# Altium PCB DE-140824_1.PcbDoc
Units mil, origin at the board's own origin, x right, y up, seen from the top; angles counter-clockwise.
Board outline 2559.06 x 1181.1 mil, 2 copper layers (Top Layer, Bottom Layer); 26 components, 215 nets, 80 pads, 8 vias.
Unrouted connection lines stored in the file: 1.
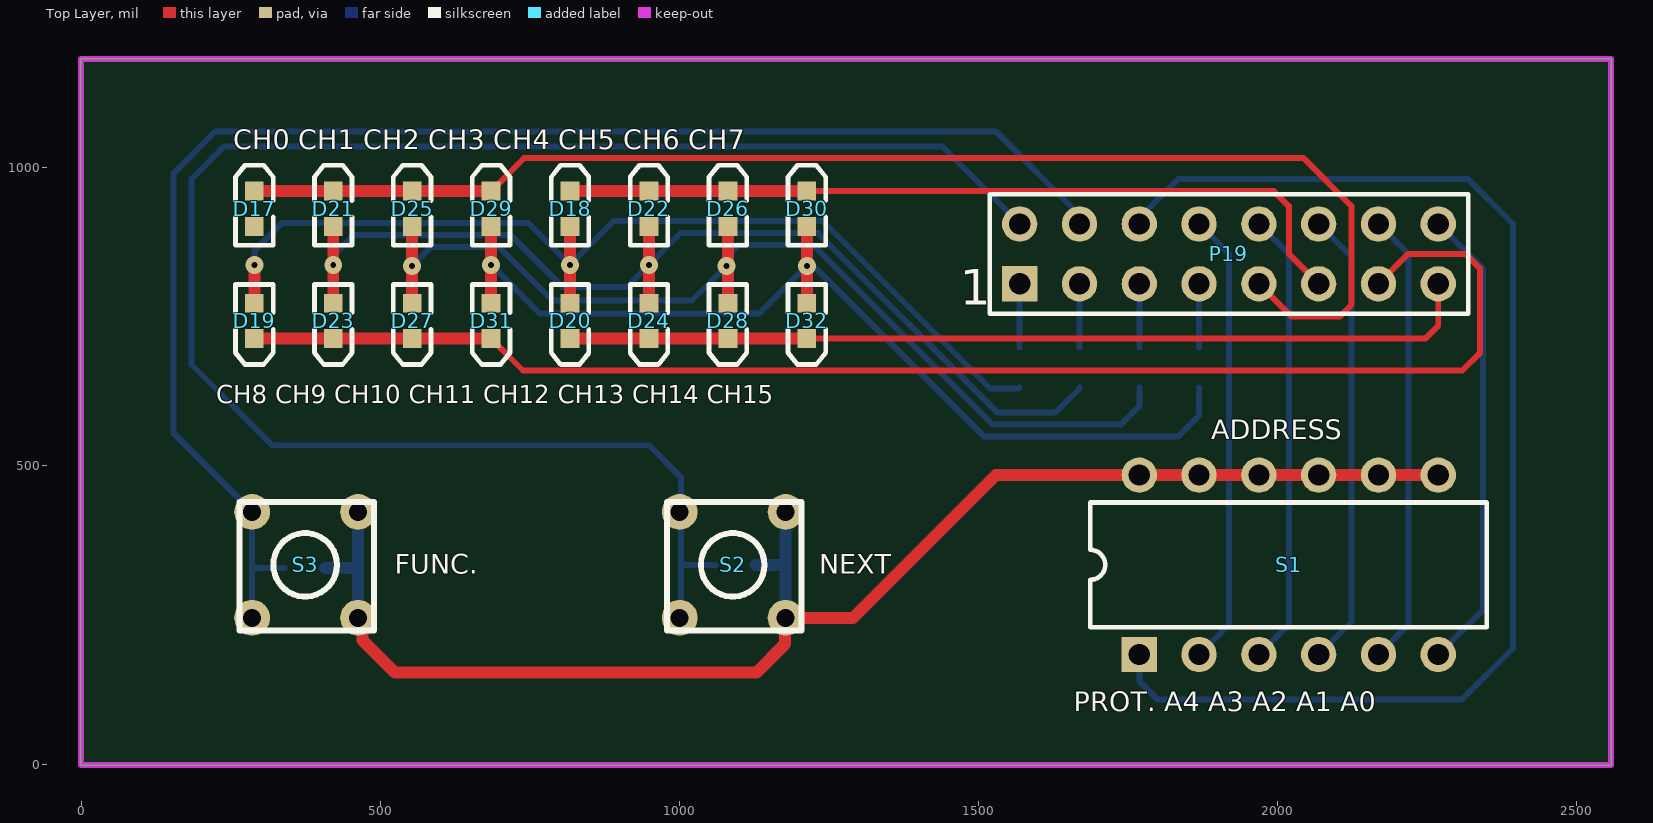
[diagram p0: Top Layer view]
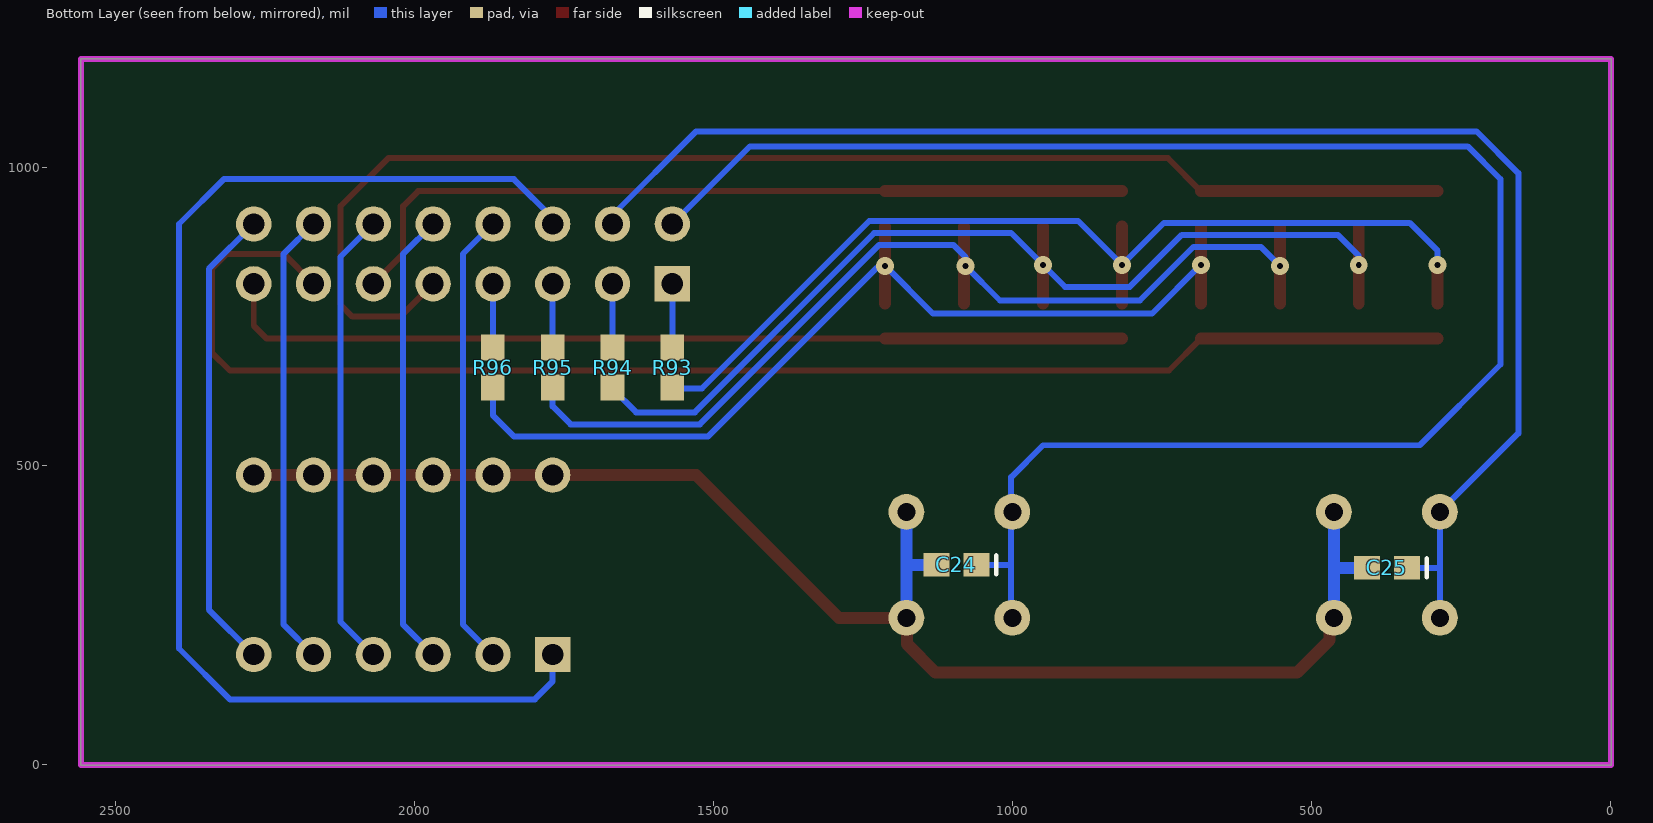
[diagram p1: Bottom Layer view, seen from below]

## Layer stack, top to bottom
Top Solder: solder mask 0.4, Solder Resist, Dk 3.5
Top Layer: signal copper 1.4
Dielectric 1: dielectric 12.6, FR-4, Dk 4.8
Bottom Layer: signal copper 1.4
Bottom Solder: solder mask 0.4, Solder Resist, Dk 3.5

## Board outline
-1.26,-0.3 -1.26,1180.81 2557.8,1180.81 2557.8,-0.3

## Design rules (kind name [scope] priority, off if disabled: settings)
Clearance [All] p1: gap=10 ignorepadtopadclearanceinfootprint=FALSE
PolygonConnect [All] p1: connectstyle=Relief reliefconductorwidth=10 reliefentries=4 polygonreliefangle="90 Angle" airgapwidth=10
RoutingVias [All] p1: holewidth=28 width=50 viastyle="Through Hole" minholewidth=10 minwidth=30 maxholewidth=28 maxwidth=50
SolderMaskExpansion [All] p1: expansion=4 istentingtop=FALSE
SupplyNets "Schematic Supply Nets_10" [InNet('L1')] p1: voltage=0.000
SupplyNets "Schematic Supply Nets_9" [InNet('GND1')] p2: voltage=0.000
SupplyNets "Schematic Supply Nets_8" [InNet('GND')] p3: voltage=0.000
SupplyNets "Schematic Supply Nets_7" [InNet('L_1')] p4: voltage=0.000
SupplyNets "Schematic Supply Nets_6" [InNet('L_2')] p5: voltage=0.000
SupplyNets "Schematic Supply Nets_5" [InNet('3V3')] p6: voltage=0.000
SupplyNets "Schematic Supply Nets_4" [InNet('F2')] p7: voltage=0.000
SupplyNets "Schematic Supply Nets_3" [InNet('F1')] p8: voltage=0.000
SupplyNets "Schematic Supply Nets_2" [InNet('5V')] p9: voltage=0.000
SupplyNets "Schematic Supply Nets_1" [InNet('L2')] p10: voltage=0.000
SupplyNets "Schematic Supply Nets" [InNet('12V')] p11: voltage=0.000
Width [All] p1: maxlimit=100 minlimit=10 preferedwidth=20
30 further rules are at their usual default settings.

## Classes and differential pairs
component class DE-140824: P2 P3 P10 P11 P12 P13 U1 U3 U4

## Components (designator, comment, footprint, x,y, rotation, side; value= is the part's Value field where it differs from the comment)
C24 "C0603" 0603 1093.74,334.7 r0 bottom value=100nF
C25 "C0603" 0603 373.74,329.7 r0 bottom value=100nF
D17 "LED0" 1.6X0.8X0.8 288.74,930.18 r90 top
D18 "LED4" 1.6X0.8X0.8 816.74,930.18 r90 top
D19 "LED8" 1.6X0.8X0.8 288.74,742.58 r270 top
D20 "LED12" 1.6X0.8X0.8 816.74,742.58 r270 top
D21 "LED1" 1.6X0.8X0.8 420.74,930.18 r90 top
D22 "LED5" 1.6X0.8X0.8 948.74,930.18 r90 top
D23 "LED9" 1.6X0.8X0.8 420.74,742.58 r270 top
D24 "LED13" 1.6X0.8X0.8 948.74,742.58 r270 top
D25 "LED2" 1.6X0.8X0.8 552.74,930.18 r90 top
D26 "LED6" 1.6X0.8X0.8 1080.74,930.18 r90 top
D27 "LED10" 1.6X0.8X0.8 552.74,742.58 r270 top
D28 "LED14" 1.6X0.8X0.8 1080.74,742.58 r270 top
D29 "LED3" 1.6X0.8X0.8 684.74,930.18 r90 top
D30 "LED7" 1.6X0.8X0.8 1212.74,930.18 r90 top
D31 "LED11" 1.6X0.8X0.8 684.74,742.58 r270 top
D32 "LED15" 1.6X0.8X0.8 1212.74,742.58 r270 top
P19 "Header 8X2" HDR2X8 1568.74,804.7 r0 top
R93 "220R" ERA-0603 1568.74,664.7 r270 bottom
R94 "220R" ERA-0603 1668.74,664.7 r270 bottom
R95 "220R" ERA-0603 1768.74,664.7 r270 bottom
R96 "220R" ERA-0603 1868.74,664.7 r270 bottom
S1 "SW DIP-6" DIP-12/SW 2018.74,334.7 r0 top
S2 "MOVE" TACTILE_SWITCH 1088.74,334.7 r0 top
S3 "FUNC" TACTILE_SWITCH 373.74,334.7 r0 top

## Footprints (in the part's own frame and the unit in brackets; to place one, negate y for a bottom-side part, rotate by r counter-clockwise, add the part's x,y. Pads: shape width x height; smd on the part's side, far side on the other; paste and mask are expansions set on the pad)
1.6X0.8X0.8 [mm] "SM LED; 2 Flat Leads"
  rect 0.8x0.8 smd: 1(-0.75,0) 2(0.75,0)
  silkscreen extent -1.55,-0.8 1.85,0.8
0603 [mm] "Chip Capacitor; Body 1.6 x 0.8 mm (LxW typ)"
  rect 1.1x1 smd: 1(-0.85,0) 2(0.85,0)
  silkscreen extent -1.7,-0.4 -1.7,0.4
DIP-12/SW [mm] "DIP Switch; 12 Leads"
  rect 1.5x1.5 hole 0.9: 1(-6.35,-3.81)
  round 1.5 hole 0.9: 2(-3.81,-3.81) 3(-1.27,-3.81) 4(1.27,-3.81) 5(3.81,-3.81) 6(6.35,-3.81) 7(6.35,3.81) 8(3.81,3.81) 9(1.27,3.81) 10(-1.27,3.81) 11(-3.81,3.81) 12(-6.35,3.81)
  silkscreen extent -8.43,-2.65 8.41,2.65
ERA-0603 [mm] "Chip Resistor; Body 1.6 x 0.8 mm (LxW typ)"
  rect 1.1x1 smd: 1(-0.85,0) 2(0.85,0)
HDR2X8 [mm] "Connector; Header; 8x2 Position"
  rect 1.5x1.5 hole 0.9: 1(0,0)
  round 1.5 hole 0.9: 2(0,2.54) 3(2.54,0) 4(2.54,2.54) 5(5.08,0) 6(5.08,2.54) 7(7.62,0) 8(7.62,2.54) 9(10.16,0) 10(10.16,2.54) 11(12.7,0) 12(12.7,2.54) 13(15.24,0) 14(15.24,2.54) 15(17.78,0) 16(17.78,2.54)
  silkscreen extent -1.27,-1.27 19.05,3.81
TACTILE_SWITCH [mil] "PCB push button"
  round 60 hole 30: 1(-88.58,88.58) 2(88.58,88.58) 3(88.58,-88.58) 4(-88.58,-88.58)
  silkscreen extent -110,-110 115,105

## Part data
C24 C25: "Ceramic Chip Capacitor - Standard", PackageDocument=Mar-2001, Code_IPC="1608 [0603]", Code_JEITA=0603, ComponentLink1Description="Manufacturer Link", ComponentLink1URL=http://www.kemet.com/, ComponentLink2Description=Datasheet, ComponentLink2URL=http://www.kemet.com/kemet/web/homepage/kechome.nsf/vapubfilesname/F3102TA.pdf/$file/F3102TA.pdf, DatasheetDocument=Mar-2001, LatestRevisionDate=19-Mar-2004, LatestRevisionNote="Silkscreen size reduced.", Note="Footprint corresponds to dimensions for bulk cassette packaging. This case size has tightened tolerances.", PackageReference=0603, Published=17-Jul-2002, Publisher="Altium Limited"
D17 D18 D19 D20 D21 D22 D23 D24 D25 D26 D27 D28 D29 D30 D31 D32: library part HSMB-C190, "Blue Surface Mount Chip LED, Blue", LED_Colour=Blue, ComponentLink1Description="Manufacturer Link", ComponentLink1URL=http://www.avagotech.com/, ComponentLink2Description=Datasheet, ComponentLink2URL=http://cp.literature.agilent.com/litweb/pdf/5988-5211EN.pdf, DatasheetVersion=26-Feb-2002, LuminousIntensity="1.6mcd (Minimum).", PackageDescription="SM LED; 2 Flat Leads", PackageReference=1.6X0.8X0.8, PackageVersion=Mar-2002, PCB_Layout="Complies with manufacturer's recommendation.", Published=11-Dec-2002, Publisher="Altium Limited"
P19: "Header, 8-Pin, Dual row", LatestRevisionDate=17-Jul-2002, LatestRevisionNote="Re-released for DXP Platform.", Publisher="Altium Limited"
R93 R94 R95 R96: library part ERAS, "Metal Film Thermosensitive Chip Resistor, 0.56 Ohm to 10k Ohm Range, 5% Tolerance, 0805 Size, 0.1 W", PackageDocument=Mar-2003, Code_IPC="2012 [0805]", ComponentLink1Description="Manufacturer Link", ComponentLink1URL=http://www.panasonic.com/industrial/components/resistive_products.htm, ComponentLink2Description=Datasheet, ComponentLink2URL=http://www.panasonic.com/industrial/components/pdf/AOF0000CE1.pdf, LatestRevisionDate=19-Mar-2004, LatestRevisionNote="Silkscreen size reduced.", Note="If flow soldering, adjust pad width of PCB Footprint to 0.7 - 0.8 times the width of the resistor.", PackageReference=ERA-0805, Published=17-Dec-2003, Publisher="Altium Limited"
S1: "DIP Switch, 6 Position, SPST", LatestRevisionDate=17-Jul-2002, LatestRevisionNote="Re-released for DXP Platform.", PackageDescription="DIP Switch; 12 Leads", PackageReference=DIP-12/SW, Published=24-Mar-1999, Publisher="Altium Limited"
S2 S3: library part TACKTILE_SWITCH

## Via types
v1: diameter 30, hole 10, Top Layer to Bottom Layer, 8 vias

## Nets (pads, with @x,y where several pads share a name; then routed paths per layer and width w, separated by ;. In a path a pad name is that pad's centre, name@x,y a point inside that pad or via, vN(x,y) a via of type N, cw(c..) or ccw(c..) an arc to the next point about the centre after c; other vN are vias at no path point)
3V3: 
5V: 
12V: 
ADDR0: P19.16 S1.6 | length 782.1
  Bottom Layer w10: S1.6 2343.74,259.7 2343.74,829.7 P19.16
ADDR1: P19.14 S1.5 | length 761.4
  Bottom Layer w10: S1.5 2218.74,234.7 2218.74,854.7 P19.14
ADDR2: P19.12 S1.4 | length 765.6
  Bottom Layer w10: S1.4 2123.74,239.7 2123.74,849.7 P19.12
ADDR3: P19.10 S1.3 | length 761.4
  Bottom Layer w10: S1.3 2018.74,234.7 2018.74,854.7 P19.10
ADDR4: P19.8 S1.2 | length 761.4
  Bottom Layer w10: S1.2 1918.74,234.7 1918.74,854.7 P19.8
ADDR_0: 
ADDR_1: 
ADDR_2: 
ADDR_3: 
ADDR_4: 
BTN_FN: 
BTN_MV: 
BTNFN: C25.1 P19.4 S3.1 S3.4 | length 2470.1
  Bottom Layer w10: S3.4 285.16,329.7 ; C25.1 285.16,329.7 ; P19.4 1668.74,919.7 1528.74,1059.7 223.74,1059.7 153.74,989.7 153.74,554.7 S3.1 285.16,329.7
BTNMV: C24.1 P19.2 S2.1 S2.4 | length 2932.8
  Bottom Layer w10: S2.4@1002.11,274.7 1002.11,334.7 ; C24.1 1002.11,334.7 ; P19.2 1438.74,1034.7 238.74,1034.7 183.74,979.7 183.74,669.7 318.74,534.7 948.74,534.7 1002.11,481.33 1002.11,334.7
CURRENT1: 
CURRENT2: 
F1: 
F2: 
GND: 
GND1: C24.2 C25.2 S1.7 S1.8 S1.9 S1.10 S1.11 S1.12 S2.2 S2.3 S3.2 S3.3 | length 2485.3
  Top Layer w20: S3.3 469.75,238.7 469.75,208.7 523.74,154.7 1128.74,154.7 1176.32,202.28 1176.32,245.11 S2.3 1290.16,246.12 1528.74,484.7 S1.12 S1.11 S1.10 S1.9 S1.8 S1.7
  Bottom Layer w20: C25.2 462.33,329.7 ; S3.3 462.33,329.7 ; S3.2 462.33,329.7 ; C24.2 1172.33,334.7 1177.33,329.7 ; S2.3 1177.33,329.7 ; S2.2 1177.33,329.7
I2C1_SCL: 
I2C1_SDA: 
L1: 
L2: 
L_1: 
L_2: 
LED_C0: 
LED_C1: 
LED_C2: 
LED_C3: 
LED_R0: 
LED_R1: 
LED_R2: 
LED_R3: 
LEDC0: D17.2 D21.2 D25.2 D29.2 P19.9 | length 2242
  Top Layer w10: D29.2 739.74,1014.7 2043.74,1014.7 2123.74,934.7 2123.74,769.7 2103.74,749.7 2023.74,749.7 P19.9
  Top Layer w20: D17.2 D21.2 D25.2 D29.2
LEDC1: D18.2 D22.2 D26.2 D30.2 P19.11 | length 1363.1
  Top Layer w10: D30.2 1993.74,959.7 2018.74,934.7 2018.74,854.7 P19.11
  Top Layer w20: D18.2 D22.2 D26.2 D30.2
LEDC2: D19.2 D23.2 D27.2 D31.2 P19.13 | length 2425.6
  Top Layer w10: D31.2 738.09,659.7 2308.74,659.7 2338.74,689.7 2338.74,829.7 2313.74,854.7 2218.74,854.7 P19.13
  Top Layer w20: D19.2 D23.2 D27.2 D31.2
LEDC3: D20.2 D24.2 D28.2 D32.2 P19.15 | length 1531
  Top Layer w10: D32.2 2247.09,713.05 2268.74,734.7 P19.15
  Top Layer w20: D20.2 D24.2 D28.2 D32.2
LEDR0: P19.1 R93.1 | length 106.5
  Bottom Layer w10: R93.1 P19.1
LEDR1: P19.3 R94.1 | length 106.5
  Bottom Layer w10: R94.1 P19.3
LEDR2: P19.5 R95.1 | length 106.5
  Bottom Layer w10: R95.1 P19.5
LEDR3: P19.7 R96.1 | length 106.5
  Bottom Layer w10: R96.1 P19.7
NetC4_2: 
NetC8_2: 
NetC11_2: 
NetC13_2: 
NetC22_2: 
NetD1_1: 
NetD1_3: 
NetD2_1: 
NetD2_3: 
NetD3_1: 
NetD3_3: 
NetD4_1: 
NetD4_3: 
NetD5_1: 
NetD5_3: 
NetD6_1: 
NetD6_3: 
NetD7_1: 
NetD7_3: 
NetD8_1: 
NetD8_3: 
NetD9_1: 
NetD9_3: 
NetD10_1: 
NetD10_3: 
NetD11_1: 
NetD11_3: 
NetD12_1: 
NetD12_3: 
NetD13_1: 
NetD13_3: 
NetD14_1: 
NetD14_3: 
NetD15_1: 
NetD15_3: 
NetD16_1: 
NetD16_3: 
NetD17_1: D17.1 D18.1 D19.1 D20.1 R93.2 | length 1691.7
  Top Layer w20: D19.1 v1(288.74,836.38) ; D20.1 v1(816.74,836.38) D18.1
  Bottom Layer w10: v1(288.74,836.38) 288.74,859.7 335.74,906.7 746.42,906.7 v1(816.74,836.38) 890.07,909.7 1239.4,909.7 1519.4,629.7 1567.21,629.7 R93.2
NetD21_1: D21.1 D22.1 D23.1 D24.1 R94.2 | length 1750.8
  Top Layer w20: D23.1 v1(420.74,836.38) D21.1 ; D24.1 v1(948.74,836.38) D22.1
  Bottom Layer w10: v1(420.74,836.38) 420.74,851.7 455.74,886.7 716.74,886.7 803.74,799.7 912.07,799.7 v1(948.74,836.38) 1002.07,889.7 1231.12,889.7 1531.12,589.7 1629.18,589.7 1668.74,629.27 R94.2
NetD25_1: D25.1 D26.1 D27.1 D28.1 R95.2 | length 1738.9
  Top Layer w20: D27.1 v1(552.74,834.7) D25.1 ; D28.1 D26.1
  Bottom Layer w10: v1(552.74,834.7) 584.42,866.38 697.17,866.38 786.84,776.7 1020.74,776.7 v1(1078.74,834.7) 1078.74,849.7 1098.74,869.7 1222.83,869.7 1522.83,569.7 1738.74,569.7 1768.74,599.7 R95.2
NetD29_1: D29.1 D30.1 D31.1 D32.1 R96.2 | length 1687.1
  Top Layer w20: D31.1 v1(684.74,836.38) D29.1 ; D32.1 v1(1212.74,834.7) D30.1
  Bottom Layer w10: v1(684.74,836.38) 766.42,754.7 1132.74,754.7 v1(1212.74,834.7) 1216.57,830.88 1227.57,830.88 1508.74,549.7 1833.74,549.7 1868.74,584.7 R96.2
NetP1_1: 
NetP1_2: 
NetP15_1: 
NetP15_2: 
NetP15_3: 
NetP15_4: 
NetP15_5: 
NetP15_6: 
NetP15_7: 
NetP15_8: 
NetP15_9: 
NetP16_1: 
NetP16_2: 
NetP16_3: 
NetP16_4: 
NetP16_5: 
NetP16_6: 
NetP16_7: 
NetP16_8: 
NetP16_9: 
NetR2_2: 
NetR3_2: 
NetR4_2: 
NetR8_1: 
NetR9_2: 
NetR12_2: 
NetR13_2: 
NetR14_1: 
NetR14_2: 
NetR15_2: 
NetR17_2: 
NetR18_1: 
NetR18_2: 
NetR19_2: 
NetR23_2: 
NetR24_1: 
NetR24_2: 
NetR25_2: 
NetR27_2: 
NetR28_1: 
NetR28_2: 
NetR29_2: 
NetR33_2: 
NetR34_1: 
NetR34_2: 
NetR35_2: 
NetR37_2: 
NetR38_1: 
NetR38_2: 
NetR39_2: 
NetR43_2: 
NetR44_1: 
NetR44_2: 
NetR45_2: 
NetR47_2: 
NetR48_1: 
NetR48_2: 
NetR49_2: 
NetR53_2: 
NetR54_1: 
NetR54_2: 
NetR55_2: 
NetR57_2: 
NetR58_1: 
NetR58_2: 
NetR59_2: 
NetR63_2: 
NetR64_1: 
NetR64_2: 
NetR65_2: 
NetR67_2: 
NetR68_1: 
NetR68_2: 
NetR69_2: 
NetR73_2: 
NetR74_1: 
NetR74_2: 
NetR75_2: 
NetR77_2: 
NetR78_1: 
NetR78_2: 
NetR79_2: 
NetR83_2: 
NetR84_1: 
NetR84_2: 
NetR85_2: 
NetR87_2: 
NetR88_1: 
NetR88_2: 
NetR89_2: 
PROT: P19.6 S1.1 | length 2120.6
  Bottom Layer w10: S1.1 1768.74,139.7 1798.74,109.7 2308.74,109.7 2393.74,194.7 2393.74,904.7 2318.74,979.7 1833.74,979.7 1768.74,914.7 P19.6
PROTOCOL: 
SWCLK: 
SWDIO: 
THY_CH0: 
THY_CH1: 
THY_CH2: 
THY_CH3: 
THY_CH4: 
THY_CH5: 
THY_CH6: 
THY_CH7: 
THY_CH8: 
THY_CH9: 
THY_CH10: 
THY_CH11: 
THY_CH12: 
THY_CH13: 
THY_CH14: 
THY_CH15: 
THY_CH_0: 
THY_CH_1: 
THY_CH_2: 
THY_CH_3: 
THY_CH_4: 
THY_CH_5: 
THY_CH_6: 
THY_CH_7: 
THY_CH_8: 
THY_CH_9: 
THY_CH_10: 
THY_CH_11: 
THY_CH_12: 
THY_CH_13: 
THY_CH_14: 
THY_CH_15: 
USART1_DE: 
USART1_RX: 
USART1_TX: 

## Keep-outs
Keep-Out Layer:
  the board outline again, w10

## Silkscreen, mask and mechanical layers (free items; w line width, h text height)
Top Overlay:
  text "CH0 CH1 CH2 CH3 CH4 CH5 CH6 CH7" at 253.74,1029.7 h33
  text "CH8 CH9 CH10 CH11 CH12 CH13 CH14 CH15" at 225,605 h30
  text "ADDRESS" at 1888.74,544.7 h33
  text "FUNC." at 523.74,319.7 h33
  text "NEXT" at 1233.74,319.7 h33
  text "PROT. A4 A3 A2 A1 A0" at 1658.74,89.7 h33

## Text inside footprints (layer, text, board x,y; h text height)
P19: Top Overlay "1" at 1468.74,769.7 h60